# Altium PCB IMU_PCB_2024_VIAS02_4Layers.PcbDoc
Units mm, origin at the board's own origin, x right, y up, seen from the top; angles counter-clockwise.
Board outline 9 x 7 mm, 4 copper layers (Top Layer, gnd, Layer 2, Bottom Layer), stack 0.537 mm thick; 16 components, 20 nets, 87 pads, 63 vias.
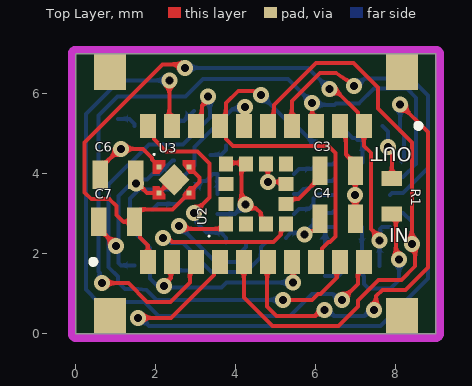
[diagram p0: Top Layer view]
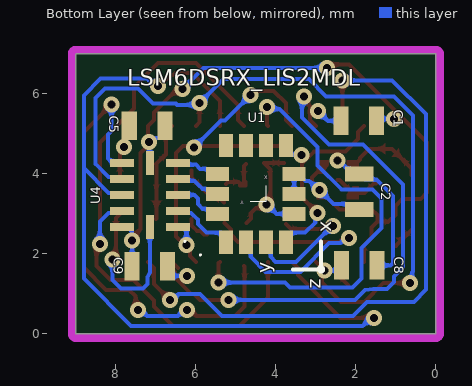
[diagram p1: Bottom Layer view, seen from below]
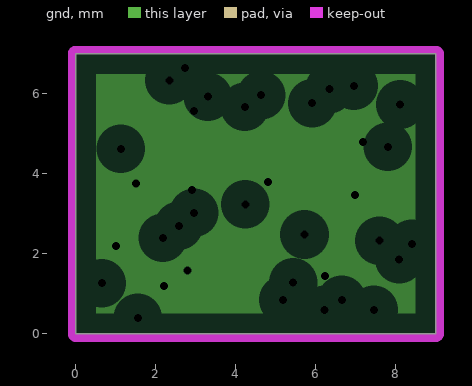
[diagram p2: gnd, clearances drawn from the general rule]
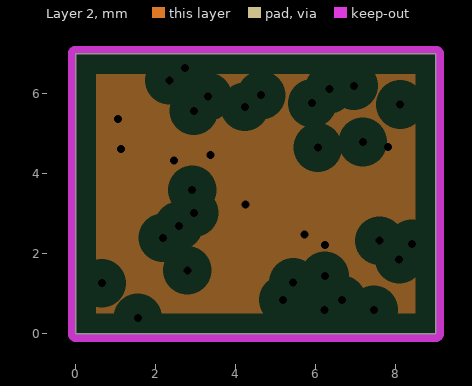
[diagram p3: Layer 2, clearances drawn from the general rule]
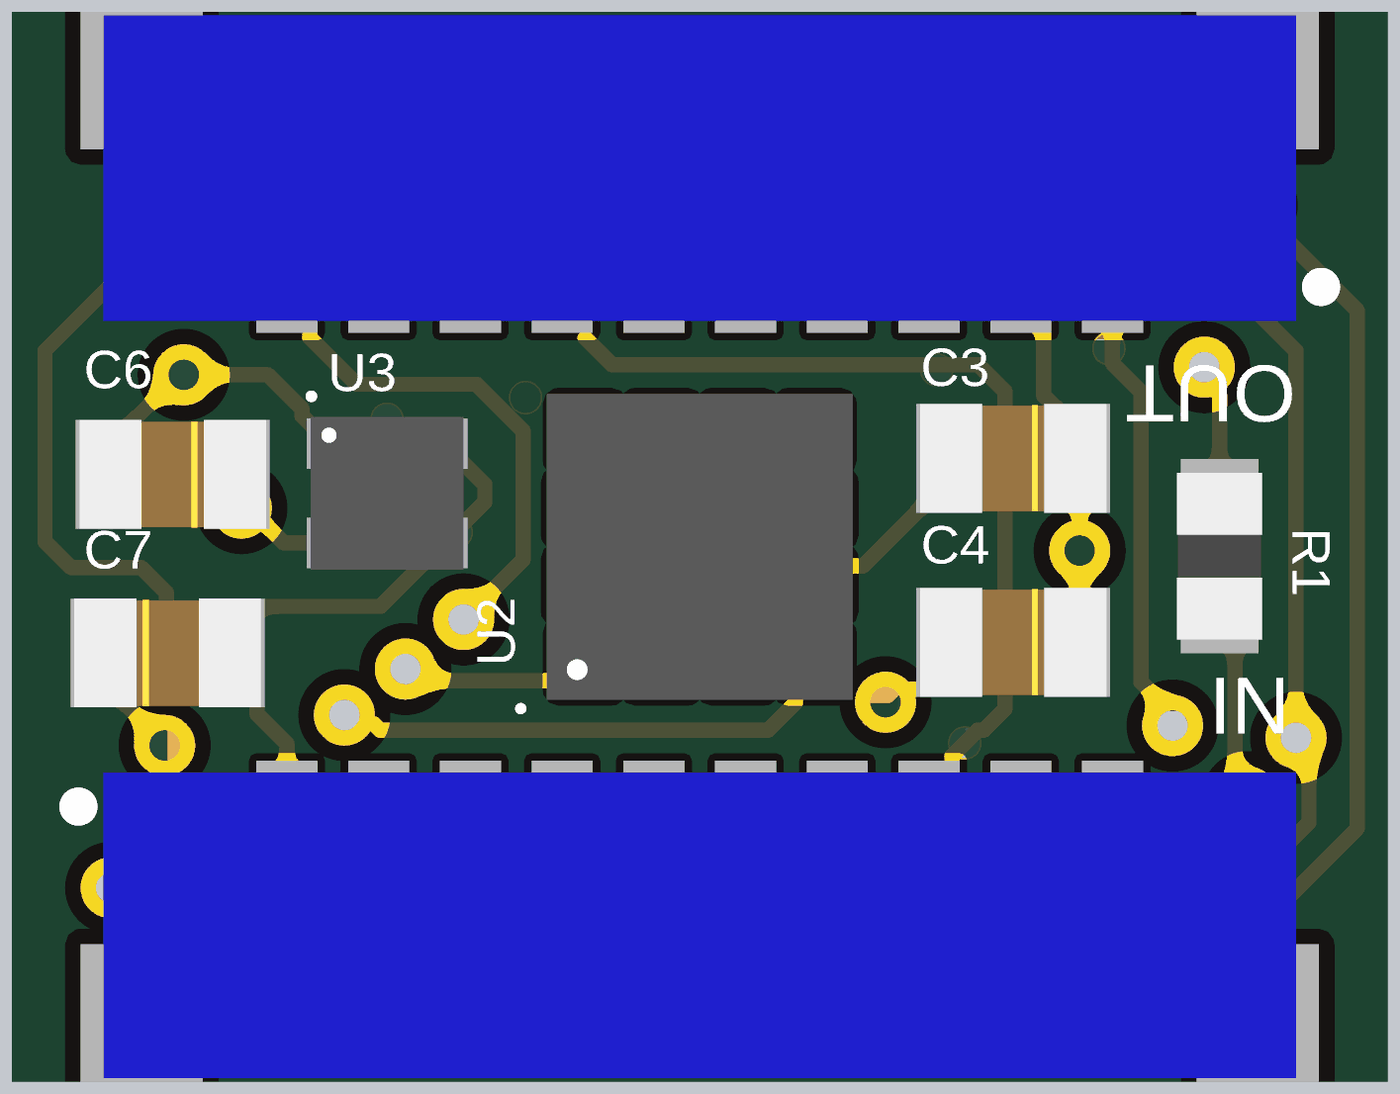
[diagram p4: 3D render of the assembled board from above, using the file's embedded part models]
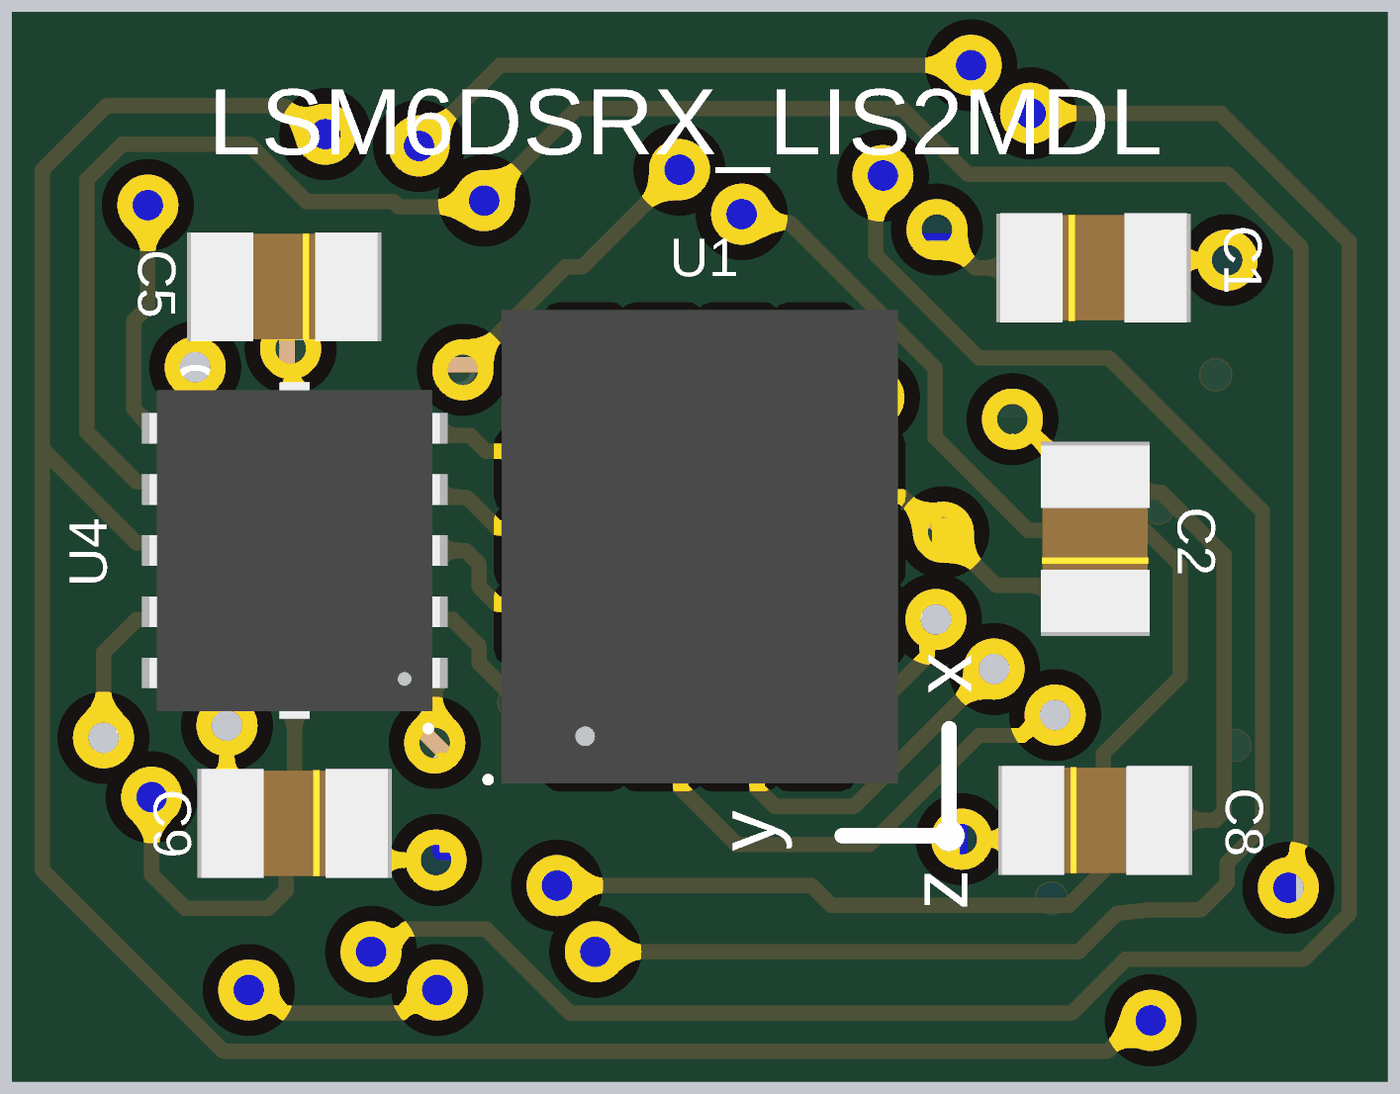
[diagram p5: 3D render of the assembled board from below, using the file's embedded part models]

## Layer stack, top to bottom
Top Solder: solder mask 0.0102, Solder Resist, Dk 3.5
Top Layer: signal copper 0.0356
Dielectric 2: prepreg 0.0711, PP-006, Dk 4.1
gnd: plane copper 0.035, net GND
Dielectric 1: core 0.254, FR-4, Dk 4.2
Layer 2: plane copper 0.035, net 1V8
Dielectric 3: prepreg 0.0711, PP-006, Dk 4.1
Bottom Layer: signal copper 0.0356
Solder Side: solder mask 0.0102, Solder Resist, Dk 3.5

## Board outline
0,7 0,0 9,0 9,7

## Design rules (kind name [scope] priority, off if disabled: settings)
Clearance Clearance_tracks [All] p1: gap=0.1 ignorepadtopadclearanceinfootprint=FALSE except(0: Arc-Hole Track-Hole SMDPad-Hole THPad-Hole Via-Hole Fill-Hole Poly-Hole Region-Hole Text-Hole; 0.15: Arc-Arc Arc-Track Arc-SMDPad Arc-THPad Arc-Via Arc-Fill Arc-Poly Arc-Region Track-Track Track-SMDPad Track-THPad Track-Via Track-Fill Track-Poly Track-Region)
Clearance Clearance_3 [OnLayer('Power Plane (VCC)') or InNet('4V')] p2: gap=0.254 ignorepadtopadclearanceinfootprint=FALSE except(0: Arc-Hole Track-Hole SMDPad-Hole THPad-Hole Via-Hole Fill-Hole Poly-Hole Region-Hole Text-Hole)
Clearance Clearance_2 [(InComponent('MPU-9250') AND OnLayer('Bottom Layer') AND HasFootprint('MPU-2950'))] p3: gap=0.1 ignorepadtopadclearanceinfootprint=FALSE except(0: Arc-Hole Track-Hole SMDPad-Hole THPad-Hole Via-Hole Fill-Hole Poly-Hole Region-Hole Text-Hole)
Clearance keepout [OnLayer('Keep-Out Layer')] p4: gap=0.1 ignorepadtopadclearanceinfootprint=FALSE except(0: Arc-Hole Track-Hole SMDPad-Hole THPad-Hole Via-Hole Fill-Hole Poly-Hole Region-Hole Text-Hole)
Clearance "Clearance - Vias Pad" [IsVia vs IsPad] p5: gap=0.1 ignorepadtopadclearanceinfootprint=FALSE except(0: Arc-Hole Track-Hole SMDPad-Hole THPad-Hole Via-Hole Fill-Hole Poly-Hole Region-Hole Text-Hole)
Clearance "Clearance Pad to Pad" [IsPad vs IsPad] p6: gap=0.1 ignorepadtopadclearanceinfootprint=FALSE except(0: Arc-Hole Track-Hole SMDPad-Hole THPad-Hole Via-Hole Fill-Hole Poly-Hole Region-Hole Text-Hole)
Clearance [All] p7: gap=0.1 ignorepadtopadclearanceinfootprint=FALSE except(0: Arc-Hole Track-Hole SMDPad-Hole THPad-Hole Via-Hole Fill-Hole Poly-Hole Region-Hole Text-Hole)
DiffPairsRouting [All] p1: maxlimit=0.254 minlimit=0.254 mostfreqgap=0.254 toplayer_minwidth=0.2 toplayer_maxwidth=0.381 toplayer_prefwidth=0.254 bottomlayer_minwidth=0.2 bottomlayer_maxwidth=0.381 bottomlayer_prefwidth=0.254 maxuncoupledlength=12.7
HoleToHoleClearance [All] p1: gap=0.1 allowstackedmicrovias=TRUE
MinimumSolderMaskSliver [All] p1: minsoldermaskwidth=0.02
PlaneClearance [All] p1: clearance=0.508
PlaneConnect [All] p1: planeconnectstyle=Direct reliefexpansion=0.508 reliefentries=4 reliefconductorwidth=0.254 reliefairgap=0.254
PolygonConnect [All] p1: connectstyle=Direct reliefconductorwidth=0.254 reliefentries=4 polygonreliefangle="90 Angle" airgapwidth=0.254
RoutingLayers RoutingLayersPWR [(InNet('4V') OR InNet('5V') OR InNet('5V NON ISOLATED'))] p2: top layer_v5=TRUE bottom layer_v5=TRUE
RoutingPriority "RountingPriority Power" [(InNet('GND') OR InNet('POWER GND') OR InNet('5V') OR InNet('5V NON ISOLATED') OR InNet('24V'))] p1: routingpriority=10
RoutingPriority "RoutingPriority RS485" [(InNet('RS485_N') OR InNet('RS485_P'))] p2: routingpriority=8
RoutingPriority "RoutingPriority Hard Ones" [(InNet('SIGNAL 1 A') OR InNet('SIGNAL 1 B') OR InNet('SIGNAL 1 C') OR InNet('SIGNAL 3 A') OR InNet('SIGNAL 3 B') OR InNet('SIGNAL 3 C'))] p3: routingpriority=6
RoutingPriority [All] p4: routingpriority=0
RoutingVias [All] p1: holewidth=0.2 width=0.4 viastyle="Through Hole" minholewidth=0.2 minwidth=0.4 maxholewidth=0.35 maxwidth=0.7
SMDNeckDown [All] p1: percent=90.000
SilkToSilkClearance [All] p1: silktosilkclearance=0.1
SilkToSolderMaskClearance SilkscreenOverComponentPads [IsPad] p1: minsilkscreentomaskgap=0.02 clearancetoexposedcopper=FALSE
SolderMaskExpansion SolderMaskExpansion_via [IsVia] p1: expansion=-0.4 istentingtop=FALSE
SolderMaskExpansion [All] p2: expansion=0.102 istentingtop=FALSE
Width [All] p1: maxlimit=2 minlimit=0.1 preferedwidth=0.1 minimp=50.000000 maximp=50.000000 favimp=50.000000
Width "Width PowerPlane" [All] p2: maxlimit=0.635 minlimit=0.508 preferedwidth=0.508
22 further rules are at their usual default settings.

## Components (designator, comment, footprint, x,y, rotation, side; value= is the part's Value field where it differs from the comment)
C1 "100nF" C0402 1.925,5.325 r180 bottom
C2 "100nF" C0402 1.914,3.552 r90 bottom
C3 "220nF" C0402 6.55,4.078 r180 top
C4 "100nF" C0402 6.55,2.875 r180 top
C5 "10uF" C0402 7.218,5.202 r0 bottom
C6 "1uF" C0402 1.052,3.973 r180 top
C7 "1uF" C0402 1.019,2.805 r0 top
C8 "100nF" C0402 1.913,1.71 r180 bottom
C9 "100nF" C0402 7.15,1.69 r0 bottom
IN "JST SM10B-XSRS-ETB" SM10B-XSRS-ETB 4.5,1.8 r0 top
OUT "JST SM10B-XSRS-ETB" SM10B-XSRS-ETB 4.5,5.2 r180 top locked
R1 "10K" R0402 7.275,-0.036 r90 top
U1 "LSM6DSRXTR" LSM6 4.5,3.5 r90 bottom locked
U2 "LIS2MDLTR" LIS 4.5,3.5 r90 top locked
U3 "LD39020ADTPU18R" LD3 2.455,3.849 r0 top
U4 "HPA01164RUTR" RUT12 7.15,3.475 r0 bottom

## Footprints (in the part's own frame and the unit in brackets; to place one, negate y for a bottom-side part, rotate by r counter-clockwise, add the part's x,y. Pads: shape width x height; smd on the part's side, far side on the other; paste and mask are expansions set on the pad)
C0402 [mil]
  rect 15x28 smd paste+0 mask+0: 1(-17.5,0) 2(17.5,0)
  body extent -24,-14 24,14, height 28
LD3 [mil]
  rect 5x5 smd paste-2.5 mask-2.5: 1(-14.75,12.75) 2(-14.75,-12.75) 3(14.75,-12.75) 4(14.75,12.75)
  rect 22x22 smd rot 45 paste-11 mask+0: 5(0,0)
  Top Layer region: 0,11 0,11 0,11 0,11 0,11 0,11 0,11 0,11
  Top Layer region: 0,-11 0,-11 0,-11 0,-11 0,-11 0,-11 0,-11 0,-11
  Top Layer region: 20.75,19.25 20.75,6.25 14.75,6.25 8.75,14.25 8.75,19.25
  Top Layer region: -20.75,-19.25 -20.75,-6.25 -14.75,-6.25 -8.75,-14.25 -8.75,-19.25
  Top Layer region: 20.75,-19.25 20.75,-6.25 14.75,-6.25 8.75,-14.25 8.75,-19.25
  Top Layer region: -20.75,19.25 -20.75,6.25 -14.75,6.25 -8.75,14.25 -8.75,19.25
  silkscreen extent -20,25 -19,25, body extent -20,-20 20,20, height 16
LIS [mm]
  rect 0.377x0.352 smd paste+0 mask+0.102: 1(-0.75,0.75) 2(-0.75,0.25) 3(-0.75,-0.25) 4(-0.75,-0.75) 7(0.75,-0.75) 8(0.75,-0.25) 9(0.75,0.25) 10(0.75,0.75)
  rect 0.352x0.377 smd paste+0 mask+0.102: 5(-0.25,-0.75) 6(0.25,-0.75) 11(0.25,0.75) 12(-0.25,0.75)
  silkscreen extent -1.07,1.16 -1.05,1.18, body extent -1,-1 1,1, height 0.7
LSM6 [mm]
  rect 0.577x0.352 smd paste+0 mask+0.102: 1(-1.21,0.75) 2(-1.21,0.25) 3(-1.21,-0.25) 4(-1.21,-0.75) 8(1.21,-0.75) 9(1.21,-0.25) 10(1.21,0.25) 11(1.21,0.75)
  rect 0.352x0.577 smd paste+0 mask+0.102: 5(-0.5,-0.956) 6(0,-0.956) 7(0.5,-0.956) 12(0.5,0.956) 13(0,0.956) 14(-0.5,0.956)
  silkscreen extent -1.54,-0.25 0.2,1.4, body extent -1.55,-1.3 1.55,1.3, height 0.87
R0402 [mil]
  rect 15x20 smd paste+0 mask+0: 1(119.31,-24.61) 2(154.31,-24.61)
  body extent 115,-36 158,-14, height 16
RUT12 [mm]
  rect 0.6x0.2 smd paste+0 mask+0: 1(-0.7,0.8) 2(-0.7,0.4) 3(-0.7,0) 4(-0.7,-0.4) 5(-0.7,-0.8) 7(0.7,-0.8) 8(0.7,-0.4) 9(0.7,0) 10(0.7,0.4) 11(0.7,0.8)
  rect 0.2x0.6 smd paste+0 mask+0: 6(0,-0.8) 12(0,0.8)
  silkscreen extent -0.89,1.15 -0.86,1.18, body extent -0.95,-1.1 0.95,1.1, height 0.6
SM10B-XSRS-ETB [mm] "JST XSR 10WAY angle, 0.6mm, SMD"
  rect 0.4x0.6 smd mask+0.05: 1(-2.7,0) 2(-2.1,0) 3(-1.5,0) 4(-0.9,0) 5(-0.3,0) 6(0.3,0) 7(0.9,0) 8(1.5,0) 9(2.1,0) 10(2.7,0)
  rect 0.8x0.9 smd: NC(-3.65,-1.35) NC(3.65,-1.35)
  silkscreen extent -4.11,-0.05 -4.01,0.05, body extent -3.9,-1.78 3.9,0.22, height 1.44

## Part data
C1 C2 C4 C8 C9: library part 04025C104KAT4A, "04025C104KAT4A", Mfr_Name=TDK
C3: library part C1005X5R1E224K050BC, "C1005X5R1E224K050BC", Mfr_Name=TDK
C5: library part 0402ZD106MAT2A, "0402ZD106MAT2A", Mfr_Name=TDK
C6 C7: library part 04023D105KAT2A, "04023D105KAT2A", Mfr_Name=TDK
IN OUT: library part SM10B-XSRS-ETB, "JST 10WAY angle XSR, SMT, 0.6mm, SM10B-XSRS-ETB", Manufacturer=JST, Supplier Part Number 1=90W0858, Catalogue Price=1,192, Category=Connecteurs, ComponentLink1Description=http://datasheet.octopart.com/SM10B-XSRS-ETB-JST-datasheet-12514066.pdf, ComponentLink1URL=http://datasheet.octopart.com/SM10B-XSRS-ETB-JST-datasheet-12514066.pdf, ComponentLink2Description=http://www.farnell.com/datasheets/1706598.pdf, ComponentLink2URL=http://www.farnell.com/datasheets/1706598.pdf, Contact Material=Copper, Contact Plating=Tin, Contact Termination Type="Through Hole", contact_material=Copper, contact_plating=Tin, Courant=0.2A, Currency=EUR, gender=Male, Manufacturer Part Number=SM10B-XSRS-ETB, Matériau du contact="Alliage de cuivre", Minimum Order Quantity=5, mounting_style="Through Hole", Méthode de raccordement="Montage en surface", No. of Contacts=10, No. of Rows=1, Nombre de contacts=10, Nombre de rangées=1, number_of_contacts=10, Numéro de série=SM10B, Octopart Url=http://octopart.com/sm10b-xsrs-etb-jst-29522047, OctopartID=60b7a87f3daebf70, Orientation du corps=Droit, Pas=0.6mm, Pitch Spacing=0.6, Product Range="XSR Series", Product Status=IN_STOCK, Product StockNumber=820-1677, RoHS=YES, rohs_status=Compliant, Seller Landing  Url=https://octopart-clicks.com/click/track?country=IT&ak=8157f166&sig=06796d5&sid=2402&ppid=29522047&vpid=200245201&ct=offers, Stock 1=0, Stock 2=0, Supplier 1=Newark, Supplier 2=RS-Components, Supplier Part Number 2=820-1677, Séries=XSR, Tension="30 V c.a./c.c.", Type="Fil à carte"
R1: library part RMCF0402FT10K0, "No Description Available", Mfr_Name="Stackpole International"
U1 U2 U3: "No Description Available", Mfr_Name=STMicroelectronics, RefDes=RefDes, Type=Type
U4: "No Description Available", Mfr_Name="Texas Instruments", RefDes=RefDes, Type=Type

## Via types
v1: diameter 0.4, hole 0.2, Layer 2 to Bottom Layer, 27 vias
v2: diameter 0.4, hole 0.2, Top Layer to Layer 2, 24 vias
v3: diameter 0.4, hole 0.2, Top Layer to gnd, 5 vias
v4: diameter 0.4, hole 0.2, gnd to Bottom Layer, 5 vias
v5: diameter 0.4, hole 0.2, Top Layer to Bottom Layer, 2 vias

## Nets (pads, with @x,y where several pads share a name; then routed paths per layer and width w, separated by ;. In a path a pad name is that pad's centre, name@x,y a point inside that pad or via, vN(x,y) a via of type N, cw(c..) or ccw(c..) an arc to the next point about the centre after c; other vN are vias at no path point)
1V8: C1.2 C2.2 C4.2 C5.2 C6.2 C8.2 R1.2 U1.5 U1.8 U2.3 U2.9 U2.10 U3.1 U4.1 | length 13
  Top Layer w0.1: C6.2 0.608,4.138 1.095,4.625 1.674,4.625 1.899,4.4 1.899,4.354 2.067,4.187 U3.1 ; U2.10@3.8,4.275 4.3,4.275 4.138,4.113 4.138,3.138 4.509,3.138 4.626,3.021 4.626,2.888 U2.3@4.739,2.775 ; v2(5.715,2.483) 5.796,2.483 5.883,2.569 5.965,2.569 6.105,2.71 C4.2 ; v2(7.8,4.675) 7.8,4.594 7.9,4.494 R1.2
  Bottom Layer w0.1: v1(1.05,5.375) 1.34,5.375 1.47,5.245 C1.2@1.47,5.2 ; C8.2 1.128,1.71 1.069,1.769 1.069,3.446 1.48,3.856 1.773,3.856 C2.2 2.079,3.997 2.417,4.335 v1(2.455,4.335) ; v1(3.361,4.476) 3.624,4.476 3.75,4.602 U1.8 ; U1.5 3.982,3 4.22,3.238 v5(4.238,3.238) ; v1(6.234,2.216) 6.234,2.625 6.284,2.675 U4.1 ; C5.2 7.8,5.064 v2(7.8,4.675)
  other v1: 7.8,4.675
  other v2: 1.125,4.625
CSI: IN.6 U4.7 | length 11.8
  Top Layer w0.1: IN.6@4.8,1.7 4.783,1.683 4.783,0.684 5.018,0.45 5.986,0.45 6.136,0.6 v1(6.217,0.6) ; v1(7.45,0.6) 7.507,0.657 7.507,0.94 7.667,1.1 8.242,1.1 8.8,1.658 8.8,5.045 v1(8.11,5.735)
  Bottom Layer w0.1: v1(6.217,0.6) 6.298,0.6 6.448,0.45 7.219,0.45 7.369,0.6 v1(7.45,0.6) ; v1(8.11,5.735) 8.11,5.072 8.2,4.982 8.2,4.4 U4.7@8.125,4.325
  other v2: 6.217,0.6 7.45,0.6 8.11,5.735
Csi_1V8: U1.12 U4.5 | length 1.1
  Bottom Layer w0.1: U1.12 5.582,4.126 5.898,4.126 6,4.228 6.403,4.228 U4.5
GND: C1.1 C2.1 C3.1 C4.1 C5.1 C6.1 C7.1 C8.1 C9.1 IN.2 OUT.2 U1.6 U1.7 U2.6 U2.8 U3.2 U3.5 U4.6 | length 11.8
  Top Layer w0.1: C7.1 0.575,2.639 1,2.214 v3(1,2.2) ; v3(1.502,3.753) 1.552,3.753 1.779,3.526 U3.2 2.404,3.849 U3.5 ; v3(2.2,1.201) 2.2,1.224 2.375,1.399 2.375,1.775 IN.2 ; U2.8 4.8,4.2 v3(4.8,3.8) ; v3@4.759,3.8 v3@4.759,3.709 ; U2.6 5.2,3.8 4.939,3.8 4.891,3.753 v3@4.891,3.709 ; OUT.2 6.75,5.05 6.75,4.488 6.997,4.241 6.985,4.229 6.985,2.885 C4.1 ; v3@4.759,3.709 v3@4.891,3.709 ; v3@4.759,3.709 4.759,3.759 v3(4.8,3.8) ; v3(4.8,3.8) v3@4.891,3.709
  Bottom Layer w0.1: C2.1 2.054,3.248 2.56,3.248 v4(2.907,3.595) ; C8.1 2.481,1.587 v4(2.787,1.587) ; C1.1 2.699,5.325 v4(2.949,5.575) ; v4@2.903,3.599 2.944,3.599 3.171,3.826 3.257,3.826 3.431,4 U1.7 U1.6 ; v4(6.225,1.45) 6.565,1.45 6.705,1.591 C9.1 ; C5.1@6.773,5.037 6.914,4.896 6.995,4.896 7.047,4.844 v4@7.176,4.844 ; U4.6 7.163,4.288 7.163,4.783 v4(7.176,4.796)
  other v3: 6.985,3.475
INT1: OUT.10 U1.4 | length 4.7
  Top Layer w0.1: OUT.10 1.95,5.05 1.95,4.867 2.254,4.563 3.04,4.563 3.344,4.259 3.344,3.413 v2(2.955,3.024)
  Bottom Layer w0.1: v2(2.955,3.024) 3.013,2.967 3.013,2.784 3.269,2.528 3.624,2.528 3.75,2.402 U1.4
  other v1: 2.955,3.024
NetC3_2: C3.2 U2.5 | length 1.2
  Top Layer w0.1: U2.5@5.3,3.286 5.388,3.374 5.567,3.374 6.108,3.915 C3.2@6.108,4.088
NetIN_7: IN.7 OUT.6 | length 11
  Top Layer w0.1: OUT.6 4.226,5.226 v1(4.226,5.676) ; IN.7 5.434,1.766 v1(5.434,1.283)
  Bottom Layer w0.1: v1(4.226,5.676) 4.169,5.619 3.911,5.619 2.961,4.668 2.961,4.214 2.352,3.606 1.583,3.606 1.358,3.381 1.358,2.649 1.859,2.148 1.859,1.38 2.084,1.154 3.642,1.154 3.77,1.283 v1(5.434,1.283)
  other v2: 5.434,1.283 4.226,5.676
NetIN_8: IN.8 OUT.7 | length 9.5
  Top Layer w0.1: OUT.7 3.75,5.35 3.75,5.766 4.06,6.076 4.442,6.076 4.551,5.967 v2(4.632,5.967) ; 3.75,4.867 3.925,4.692 6.321,4.692 6.496,4.516 6.496,2.437 6.359,2.3 6.317,2.3 6.15,2.133 6.15,1.95 IN.8
  Bottom Layer w0.1: v2(4.632,5.967) 5.267,5.333 5.374,5.333 v1(6.049,4.658)
  other v1: 4.632,5.967
NetIN_9: IN.9 OUT.8 | length 13.6
  Top Layer w0.1: OUT.8 3.15,5.35 3.15,5.695 3.302,5.847 v2(3.302,5.929) ; v1(5.183,0.85) 5.901,0.85 6.051,1 6.115,1 6.523,1.409 6.523,1.55 6.564,1.591 IN.9@6.705,1.591 ; IN.9@6.45,1.65 IN.9
  Bottom Layer w0.1: v2(3.302,5.929) 3.349,5.882 3.349,5.409 2.674,4.735 1.823,4.735 0.819,3.731 0.819,1.665 1.05,1.434 1.05,1.3 1.226,1.124 1.559,1.124 1.769,1.102 2.021,0.85 v1(5.183,0.85)
  other v1: 3.302,5.929
  other v2: 5.183,0.85
NetIN_10: IN.10 OUT.9 | length 16.1
  Top Layer w0.1: v1(2.336,6.336) 2.336,5.264 OUT.9 ; v1(6.65,0.85) 7.05,1.25 7.05,1.65 IN.10
  Bottom Layer w0.1: v1(2.336,6.336) 1.092,6.336 0.25,5.494 0.25,1.103 0.552,0.801 1.716,0.801 1.917,0.6 2.067,0.45 5.349,0.45 5.899,1 6.419,1 6.569,0.85 v1(6.65,0.85)
  other v2: 6.65,0.85 2.336,6.336
NetR1_1: R1.1 U4.12 | length 4.2
  Top Layer w0.1: R1.1 8,2.895 8,2.028 8.085,1.943 v1(8.085,1.862)
  Bottom Layer w0.1: U4.12 7.15,1.53 7.204,1.427 7.204,1.252 7.321,1.135 7.868,1.135 8.085,1.352 v1(8.085,1.862)
  other v2: 8.085,1.862
NetU1_2: U1.2 U2.4 | length 6.8
  Top Layer w0.1: v1(2.176,2.399) 2.233,2.342 2.368,2.342 2.409,2.3 2.74,2.3 4.947,2.3 5.126,2.479 5.126,2.612 U2.4@5.289,2.775
  Bottom Layer w0.1: v1(2.176,2.399) 2.257,2.399 2.39,2.266 2.674,2.266 3.388,1.551 4.259,1.551 4.626,1.919 4.626,2.165 U1.2
  other v2: 2.176,2.399
NetU1_3: U1.3 U2.1 | length 3.7
  Top Layer w0.1: v2(2.575,2.7) 2.656,2.7 2.732,2.624 3.624,2.624 U2.1
  Bottom Layer w0.1: v2(2.575,2.7) 2.593,2.7 3.491,1.801 4.009,1.801 4.126,1.919 4.126,2.051 4.25,2.176 U1.3
  other v1: 2.575,2.7
SCK: IN.3 OUT.3 U4.8 | length 19.4
  Top Layer w0.1: v2(0.65,1.269) 1.315,1.269 1.782,0.801 2.366,0.801 2.85,1.286 2.85,1.65 IN.3 ; v2(5.91,5.765) 5.91,5.29 OUT.3
  Bottom Layer w0.1: v2(0.65,1.269) 0.593,1.326 0.593,1.538 0.569,1.561 0.569,5.46 1.045,5.936 2.744,5.936 3.175,6.367 5.308,6.367 5.829,5.846 5.91,5.846 6.034,5.722 6.465,5.722 6.5,5.757 7.073,5.757 7.451,6.135 8.276,6.135 8.51,5.901 8.51,4.252 8.183,3.925 7.9,3.925 U4.8 ; v2(5.91,5.765) v1@5.91,5.875
  other v1: 0.65,1.269 5.91,5.765
SCK_1V8: U1.13 U4.4 | length 1.1
  Bottom Layer w0.1: U1.13 5.57,3.5 5.695,3.624 5.827,3.624 5.928,3.725 6.028,3.825 6.4,3.825 U4.4
SDI: IN.4 OUT.4 U4.9 | length 21
  Top Layer w0.1: v1(1.55,0.401) 2.384,0.401 3.45,1.467 3.45,1.65 IN.4 ; OUT.4 5.4,5.82 6.102,6.522 6.502,6.522 6.503,6.521 6.776,6.34 6.917,6.199 v1(6.949,6.199)
  Bottom Layer w0.1: v1(1.55,0.401) 1.631,0.401 1.833,0.2 7.616,0.2 8.8,1.384 8.8,4.142 ; v1(6.949,6.199) 7.03,6.199 7.216,6.385 8.379,6.385 8.8,5.964 8.8,4.142 ; U4.9 7.9,3.525 8.183,3.525 8.8,4.142
  other v2: 1.55,0.401 6.949,6.199
SDI_1V8: U1.14 U4.3 | length 1.3
  Bottom Layer w0.1: U1.14 5.581,3.124 5.827,3.124 5.945,3.241 5.945,3.388 6.032,3.475 U4.3
SDO: IN.5 OUT.5 U4.10 | length 16.1
  Top Layer w0.1: IN.5 4.2,0.914 4.914,0.2 6.566,0.2 7.05,0.684 7.05,0.836 7.564,1.35 8.139,1.35 8.485,1.696 8.485,2.084 8.4,2.169 v2(8.4,2.25) ; OUT.5 4.95,5.35 4.95,5.719 5.15,5.919 5.15,5.924 5.998,6.772 6.942,6.772 7.55,6.164 7.55,5.633 8.4,4.783 8.4,2.307 v2@8.429,2.279
  Bottom Layer w0.1: U4.10 7.9,3.025 8.183,3.025 8.4,2.808 v2(8.4,2.25)
  other v1: 8.4,2.25
SDO_1V8: U1.1 U4.2 | length 1.5
  Bottom Layer w0.1: U1.1@5.25,2.402 5.376,2.528 5.731,2.528 5.945,2.741 5.945,2.852 6.117,3.025 6.4,3.025 U4.2
VDD: C7.2 C9.2 IN.1 OUT.1 U3.3 U3.4 U4.11 | length 19.5
  Top Layer w0.1: IN.1 1.8,2.209 1.604,2.405 1.604,2.664 C7.2 ; v2(2.725,6.65) 2.644,6.65 2.558,6.736 2.17,6.736 0.218,4.783 0.218,3.535 0.387,3.365 0.843,3.365 1.013,3.195 1.013,2.973 1.182,2.804 C7.2 ; U3.4 U3.4@2.843,4.16 ; U3.4@2.843,4.16 3.094,3.908 3.094,3.79 2.843,3.539 2.816,3.512 2.414,3.11 1.604,3.11 1.464,2.97 C7.2 ; v1(6.336,6.122) 6.394,6.065 6.518,6.065 7.05,5.533 7.05,5.35 OUT.1 7.2,4.701 7.385,4.516 7.385,2.617 7.593,2.41 v5(7.593,2.33)
  Bottom Layer w0.1: v2(2.725,6.65) 5.808,6.65 v1(6.336,6.122) ; v5@7.587,2.323 7.593,2.317 7.593,1.692 C9.2 ; v5(7.593,2.33) 7.6,2.337 7.6,2.625 7.65,2.675 U4.11
  other v1: 2.725,6.65
  other v2: 6.336,6.122
pads on no net: IN.NC OUT.NC U1.9 U1.10 U1.11 U2.2 U2.7 U2.11 U2.12

## Polygon pours and split planes (outlines as drawn)
GND on gnd (split plane): 8.49,0.51 0.51,0.51 0.51,6.49 8.49,6.49
1V8 on Layer 2 (split plane): 8.49,0.51 0.51,0.51 0.51,6.49 8.49,6.49

## Keep-outs
Keep-Out Layer:
  lines w0.2: -0.1,0 ccw(c0,0) 0,-0.1 ; -0.1,0 ccw(c0,0) 0,-0.1 ; -0.1,0 -0.1,7 ; -0.1,7 cw(c0,7) 0,7.1 ; -0.1,7 cw(c0,7) 0,7.1 ; 0,-0.1 9,-0.1 ; 0,7.1 9,7.1 ; 9,-0.1 ccw(c9,0) 9.1,0 ; 9,-0.1 ccw(c9,0) 9.1,0 ; 9,7.1 cw(c9,7) 9.1,7 ; 9,7.1 cw(c9,7) 9.1,7 ; 9.1,0 9.1,7

## Silkscreen, mask and mechanical layers (free items; w line width, h text height)
Bottom Overlay:
  circle w0.1: c2.868,1.609 r0.05
  lines w0.1: 2.868,2.309 2.868,1.609 3.568,1.609
  text "LSM6DSRX_LIS2MDL" at 7.715,6.067 h0.7
  text "x" at 3.004,2.539 h0.6 r90
  text "y" at 4.006,1.509 h0.6 r270
  text "z" at 2.75,1.126 h0.6 r270

## Text inside footprints (layer, text, board x,y; h text height)
U1: Bottom Overlay "X" at 4.199,3.822 h0.15; Bottom Overlay "Y" at 4.807,3.365 h0.15 r180